# EAGLE board Modular Microcontroller 2560 (EAGLE 9.1.3)
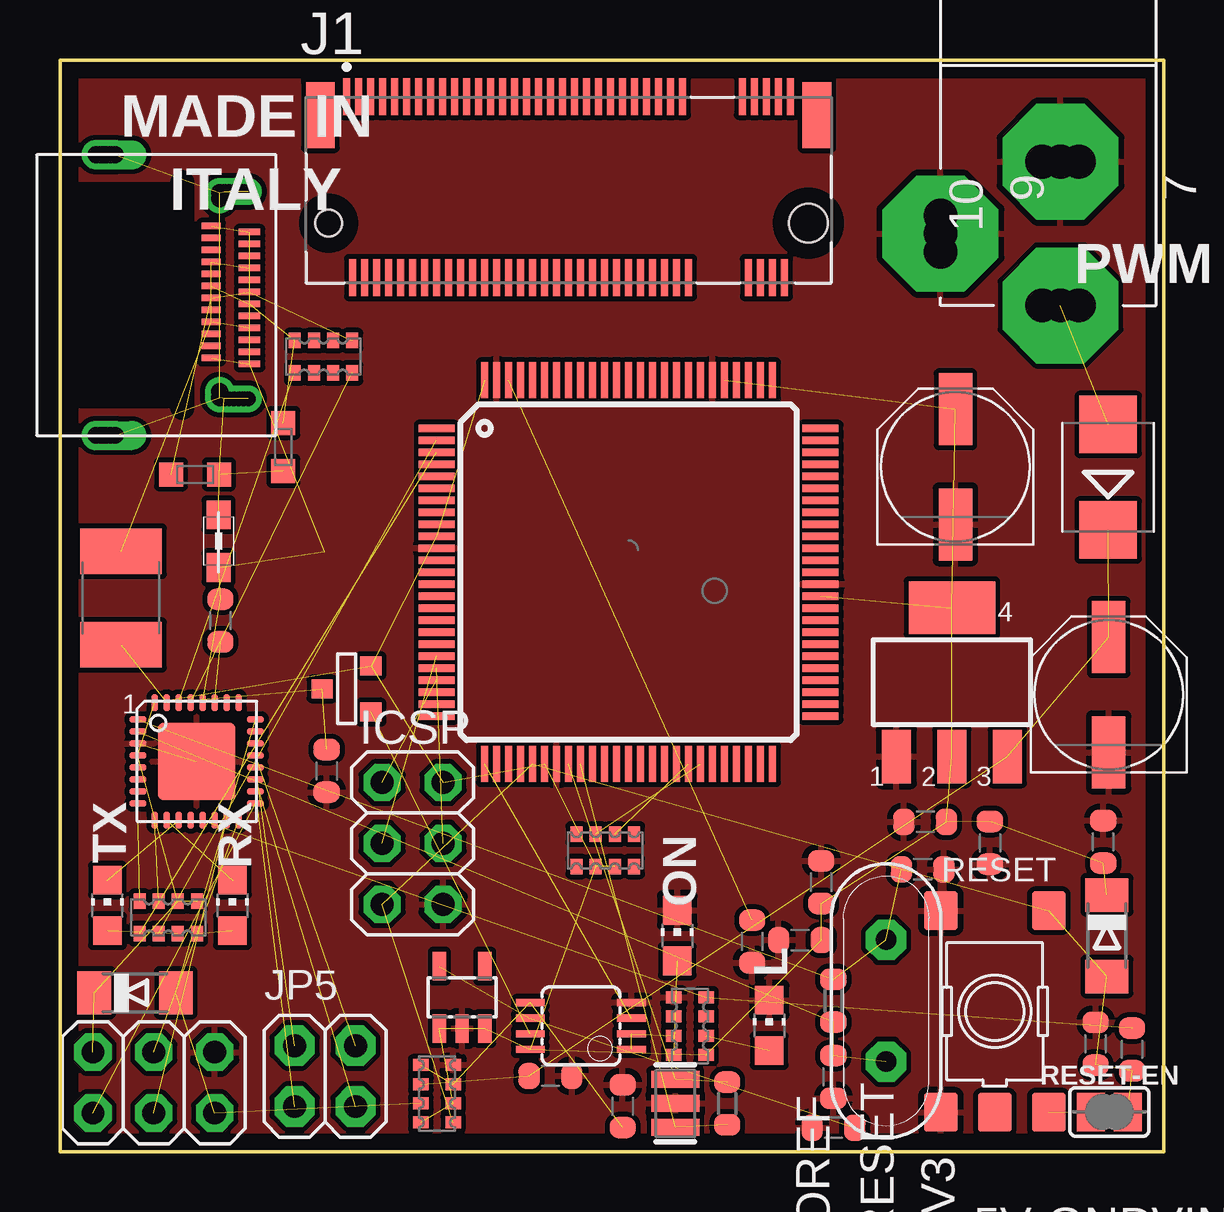
[diagram p0: board, top side]
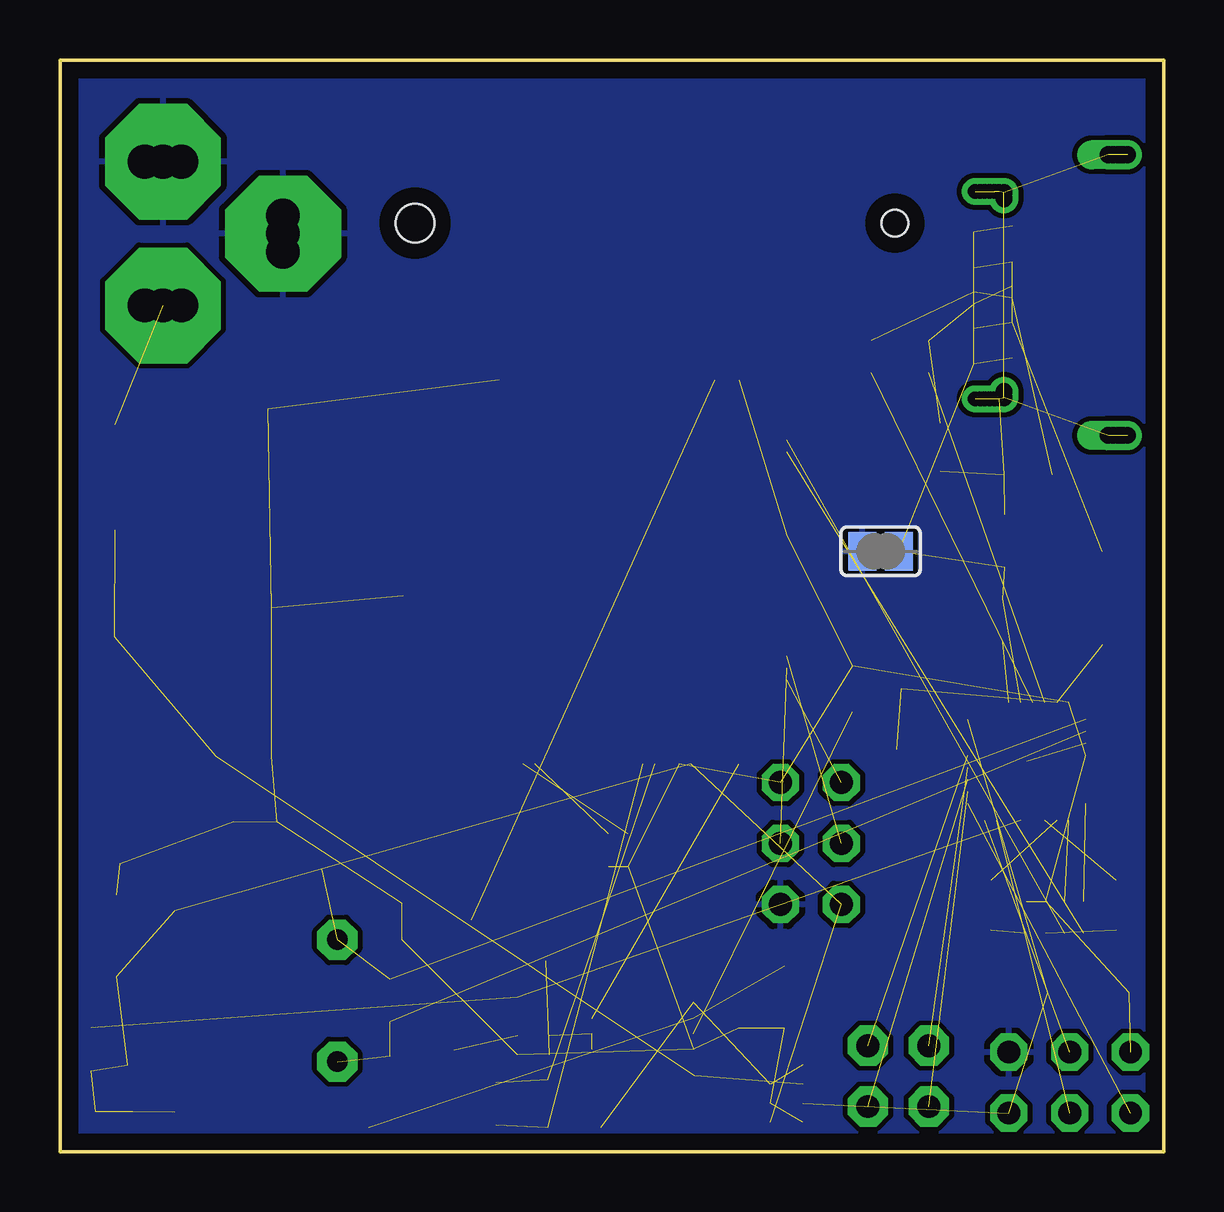
[diagram p1: board, bottom side, seen from below]

Size 46 x 45.5 mm. Coordinates in mm from the lower left corner, seen from the top.
Outline: 1.5,0 46,0 46,45.5 0,45.5 0,0
Outline: 1.5,0 0.5,0 0,0
Outline: 0,0 1.5,0
Copper layers (1*16): Top 0.035mm / dielectric 1.5mm / Bottom 0.035mm
Design rules "default *": minimum track width 25mil, minimum drill 16mil, track to track 7mil, track to pad 7mil, pad to pad 8mil, via to via 10mil, smd to smd 7mil, copper to edge 27mil, drill to drill 5mil, minimum pad ring 10mil, minimum via ring 10mil, stop-mask expansion 2mil, vias tented up to drill 24mil, thermal gap 10mil
Net classes: 0 default: width 0.203 mm, drill 0.406 mm, clearance 0.203 mm; 1 power: width 0.61 mm, drill 0.406 mm, clearance 0.203 mm; 2 gnd: width 0.305 mm, drill 0.406 mm, clearance 0.203 mm; 3 power usb: width 0.508 mm, drill 0.406 mm, clearance 0.203 mm

## Footprints (pad centres in the part's own frame; a part is rotated, then mirrored left to right if it is on the bottom)
C0603-ROUND = smd 0.898 x 1.1: 1 -0.889,0; 2 0.889,0
SMB = smd 2.4 x 2.4: A 2.2,0; C -2.2,0
MINIMELF = smd 1.4 x 1.8: A 1.7,0; C -1.7,0
L1812 = smd 1.9 x 3.4: 1 -1.95,0; 2 1.95,0
SJ = smd 1.168 x 1.6: 1 -0.762,0; 2 0.762,0
SOT223 = smd 1.219 x 2.235: 1 -2.311,-3.099; 2 0,-3.099; 3 2.311,-3.099 | smd 3.6 x 2.2: 4 0,3.099
TQFP100 = smd 1.5 x 0.3: 1 -8,6; 2 -8,5.5; 3 -8,5; 4 -8,4.5; 5 -8,4; 6 -8,3.5; 7 -8,3; 8 -8,2.5; 9 -8,2; 10 -8,1.5; 11 -8,1; 12 -8,0.5; 13 -8,0; 14 -8,-0.5; 15 -8,-1; 16 -8,-1.5; 17 -8,-2; 18 -8,-2.5; 19 -8,-3; 20 -8,-3.5; 21 -8,-4; 22 -8,-4.5; 23 -8,-5; 24 -8,-5.5; 25 -8,-6; 51 8,-6; 52 8,-5.5; 53 8,-5; 54 8,-4.5; 55 8,-4; 56 8,-3.5; 57 8,-3; 58 8,-2.5; 59 8,-2; 60 8,-1.5; 61 8,-1; 62 8,-0.5; 63 8,0; 64 8,0.5; 65 8,1; 66 8,1.5; 67 8,2; 68 8,2.5; 69 8,3; 70 8,3.5; 71 8,4; 72 8,4.5; 73 8,5; 74 8,5.5; 75 8,6 | smd 0.3 x 1.5: 26 -6,-8; 27 -5.5,-8; 28 -5,-8; 29 -4.5,-8; 30 -4,-8; 31 -3.5,-8; 32 -3,-8; 33 -2.5,-8; 34 -2,-8; 35 -1.5,-8; 36 -1,-8; 37 -0.5,-8; 38 0,-8; 39 0.5,-8; 40 1,-8; 41 1.5,-8; 42 2,-8; 43 2.5,-8; 44 3,-8; 45 3.5,-8; 46 4,-8; 47 4.5,-8; 48 5,-8; 49 5.5,-8; 50 6,-8; 76 6,8; 77 5.5,8; 78 5,8; 79 4.5,8; 80 4,8; 81 3.5,8; 82 3,8; 83 2.5,8; 84 2,8; 85 1.5,8; 86 1,8; 87 0.5,8; 88 0,8; 89 -0.5,8; 90 -1,8; 91 -1.5,8; 92 -2,8; 93 -2.5,8; 94 -3,8; 95 -3.5,8; 96 -4,8; 97 -4.5,8; 98 -5,8; 99 -5.5,8; 100 -6,8
MLF32 = smd 0.7 x 0.28: 1 -2.45,1.75; 2 -2.45,1.25; 3 -2.45,0.75; 4 -2.45,0.25; 5 -2.45,-0.25; 6 -2.45,-0.75; 7 -2.45,-1.25; 8 -2.45,-1.75; 17 2.45,-1.75; 18 2.45,-1.25; 19 2.45,-0.75; 20 2.45,-0.25; 21 2.45,0.25; 22 2.45,0.75; 23 2.45,1.25; 24 2.45,1.75 | smd 0.28 x 0.7: 9 -1.75,-2.45; 10 -1.25,-2.45; 11 -0.75,-2.45; 12 -0.25,-2.45; 13 0.25,-2.45; 14 0.75,-2.45; 15 1.25,-2.45; 16 1.75,-2.45; 25 1.75,2.45; 26 1.25,2.45; 27 0.75,2.45; 28 0.25,2.45; 29 -0.25,2.45; 30 -0.75,2.45; 31 -1.25,2.45; 32 -1.75,2.45 | smd 3.254 x 3.254: 33 0,0
SOT23-DBV = smd 0.55 x 1.2: 1 -0.95,-1.3; 2 0,-1.3; 3 0.95,-1.3; 4 0.95,1.3; 5 -0.95,1.3
MSOP08 = smd 0.3 x 1.2: 1 -0.976,-2.113; 2 -0.326,-2.113; 3 0.324,-2.113; 4 0.974,-2.113; 5 0.974,2.112; 6 0.324,2.112; 7 -0.326,2.112; 8 -0.976,2.112
2X03 = drill 0.95 pad 1.55 octagon: 1 -2.54,-1.27; 2 -2.54,1.27; 3 0,-1.27; 4 0,1.27; 5 2.54,-1.27; 6 2.54,1.27
TE_1-2199119-3 = smd 0.3 x 1.55: 1 -9.25,5.275; 2 -9,-2.275; 3 -8.75,5.275; 4 -8.5,-2.275; 5 -8.25,5.275; 6 -8,-2.275; 7 -7.75,5.275; 8 -7.5,-2.275; 9 -7.25,5.275; 10 -7,-2.275; 11 -6.75,5.275; 12 -6.5,-2.275; 13 -6.25,5.275; 14 -6,-2.275; 15 -5.75,5.275; 16 -5.5,-2.275; 17 -5.25,5.275; 18 -5,-2.275; 19 -4.75,5.275; 20 -4.5,-2.275; 21 -4.25,5.275; 22 -4,-2.275; 23 -3.75,5.275; 24 -3.5,-2.275; 25 -3.25,5.275; 26 -3,-2.275; 27 -2.75,5.275; 28 -2.5,-2.275; 29 -2.25,5.275; 30 -2,-2.275; 31 -1.75,5.275; 32 -1.5,-2.275; 33 -1.25,5.275; 34 -1,-2.275; 35 -0.75,5.275; 36 -0.5,-2.275; 37 -0.25,5.275; 38 0,-2.275; 39 0.25,5.275; 40 0.5,-2.275; 41 0.75,5.275; 42 1,-2.275; 43 1.25,5.275; 44 1.5,-2.275; 45 1.75,5.275; 46 2,-2.275; 47 2.25,5.275; 48 2.5,-2.275; 49 2.75,5.275; 50 3,-2.275; 51 3.25,5.275; 52 3.5,-2.275; 53 3.75,5.275; 54 4,-2.275; 55 4.25,5.275; 56 4.5,-2.275; 57 4.75,5.275; 58 5,-2.275; 67 7.25,5.275; 68 7.5,-2.275; 69 7.75,5.275; 70 8,-2.275; 71 8.25,5.275; 72 8.5,-2.275; 73 8.75,5.275; 74 9,-2.275; 75 9.25,5.275 | smd 1.2 x 2.75: S1 -10.35,4.5; S2 10.35,4.5 | hole 1.1: -10,0 | hole 1.6: 10,0
2X02 = drill 0.95 pad 1.676 octagon: 1 -1.27,-1.27; 2 -1.27,1.27; 3 1.27,-1.27; 4 1.27,1.27
CHIP-LED0805 = smd 1.2 x 1.2: A 0,-1.05; C 0,1.05
0805 = smd 1.2 x 1: 1 -1.1,0; 2 1.1,0
PANASONIC_D = smd 3 x 1.4: + 2.4,0; - -2.4,0
R0603-ROUND = smd 0.898 x 1.1: 1 -0.889,0; 2 0.889,0
TS42 = smd 1.6 x 1.4: 1 -4.2,2.25; 2 4.2,2.25; 3 -4.2,-2.25; 4 4.2,-2.25; 5 -4.2,0
CAT16 = smd 0.5 x 0.65: 1 -1.2,-0.675; 2 -0.4,-0.675; 3 0.4,-0.675; 4 1.2,-0.675; 5 1.2,0.675; 6 0.4,0.675; 7 -0.4,0.675; 8 -1.2,0.675
CAY16 = smd 0.5 x 0.65: 1 -1.2,-0.675; 2 -0.4,-0.675; 3 0.4,-0.675; 4 1.2,-0.675; 5 1.2,0.675; 6 0.4,0.675; 7 -0.4,0.675; 8 -1.2,0.675
SOT-23 = smd 0.787 x 0.889: 1 0.025,-1.016; 2 -0.94,1.016; 3 0.991,1.016
USB-TYPE-C-SMT = smd 0.27 x 0.9: 1 -2.625,0.7; 2 -2.125,0.7; 3 -1.625,0.7; 4 -1.125,0.7; 5 -0.625,0.7; 6 -0.125,0.7; 7 0.375,0.7; 8 0.875,0.7; 9 1.375,0.7; 10 1.875,0.7; 11 2.375,0.7; 12 2.875,0.7 | smd 0.27 x 0.8: B1 2.625,-0.9; B2 2.125,-0.9; B3 1.625,-0.9; B4 1.125,-0.9; B5 0.625,-0.9; B6 0.125,-0.9; B7 -0.375,-0.9; B8 -0.875,-0.9; B9 -1.375,-0.9; B10 -1.875,-0.9; B11 -2.375,-0.9; B12 -2.875,-0.9 | drill 0.6: P$1 -4.32,0.25; P$2 4.32,0.65; P$3 -4.32,0.65; P$4 -4.32,0.45; P$7 -4.32,-0.35; P$8 -4.32,0.05; P$9 -4.32,-0.15; P$10 4.32,0.45; P$11 4.32,0.25; P$12 4.32,0.05; P$13 4.32,-0.15; P$14 4.32,-0.35 | drill 0.7 offset: P$5 5.85,-5.4; P$23 -5.85,-5.4 | drill 0.7: P$6 -5.85,-5.3; P$15 4.27,-0.55; P$16 -4.02,-0.55; P$17 -4.27,-0.55; P$18 4.02,-0.55; P$19 -5.85,-5.7; P$20 -5.85,-5.5; P$21 -5.85,-5.1; P$22 -5.85,-4.9; P$24 5.85,-5.7; P$25 5.85,-5.5; P$26 5.85,-5.3; P$27 5.85,-5.1; P$28 5.85,-4.9
POWERSUPPLY_DC-21MM = drill 1.4 pad 4.826 octagon: 1 -5.08,-3.353; 2 -0.076,-6.35; 3 -0.076,-0.356 | drill 1.4: 4 -5.08,-4.115; 5 -5.08,-2.591; 6 -0.838,-0.356; 7 0.686,-0.356; 8 -0.838,-6.35; 9 0.686,-6.35
RESONATOR = smd 0.7 x 2: 1 -1,0; 2 0,0; 3 1,0
QS = drill 0.85 pad 1.676 octagon: 1 -2.54,0; 2 2.54,0
CT/CN0603 = smd 1 x 1: 1 -1,0; 2 1,0

## Placement (x,y rotation side)
C1  22p  [C0603-ROUND]  43.17,4.49 90 top
C2  100n  [C0603-ROUND]  20.45,3.15 0 top
C3  100n  [C0603-ROUND]  28.85,8.76 270 top
C4  100n  [C0603-ROUND]  43.49,12.91 90 top
C5  100n  [C0603-ROUND]  31.73,11.23 90 top
C6  100n  [C0603-ROUND]  30.84,8.82 180 top
C7  100n  [C0603-ROUND]  44.69,4.26 270 top
C8  100n  [C0603-ROUND]  11.11,15.86 270 top
C9  100n  [C0603-ROUND]  38.76,12.86 270 top
C10  1u  [C0603-ROUND]  6.69,22.14 90 top
C11  100n  [C0603-ROUND]  36.06,13.74 0 top
C12  100n  [C0603-ROUND]  23.45,1.89 270 top
C13  1u  [C0603-ROUND]  32.24,0.99 0 top
C14  22p  [C0603-ROUND]  35.96,11.76 0 top
C15  22p  [C0603-ROUND]  32.24,3.11 270 top
D1  M7  [SMB]  43.69,28.11 90 top
D2  CD1206-S01575  [MINIMELF]  3.13,6.62 0 top
D3  CD1206-S01575  [MINIMELF]  43.64,9 270 top
F1  MF-MSMF050-2 500mA  [L1812]  2.54,23.07 90 top
GROUND  [SJ]  11.79,25.02 180 bottom
IC1  NCP1117ST50T3G  [SOT223]  37.18,19.56 0 top
IC3  ATMEGA2560-16AU  [TQFP100]  23.7,24.15 0 top
IC4  ATMEGA16U2-MU  [MLF32]  5.7,16.26 0 top
IC6  LP2985-33DBVR  [SOT23-DBV]  16.76,6.43 0 top
IC7  LMV358IDGKR  [MSOP08]  21.71,5.24 90 top
ICSP  3x2M  [2X03]  14.7,12.84 270 top
ICSP1  3x2M  [2X03]  3.91,2.87 0 top
J1  1-2199119-3  [TE_1-2199119-3]  21.2,38.7 0 top
JP5  2x2M - NM  [2X02]  11.05,3.14 0 top
L  YELLOW  [CHIP-LED0805]  29.56,5.26 0 top
L1  BLM21  [0805]  6.61,25.45 90 top
ON  GREEN  [CHIP-LED0805]  25.73,9 0 top
PC1  47u  [PANASONIC_D]  43.72,19.04 90 top
PC2  47u  [PANASONIC_D]  37.33,28.54 90 top
R1  1M  [R0603-ROUND]  27.81,2.01 90 top
R2  1M  [R0603-ROUND]  32.24,6.29 270 top
RESET  TS42031-160R-TR-7260  [TS42]  38.97,5.84 90 top
RESET-EN  [SJ]  43.74,1.65 0 top
RN1  10K  [CAT16]  22.73,12.55 180 top
RN2  22R  [CAY16]  10.98,33.13 0 top
RN3  1k  [CAY16]  26.26,5.23 90 top
RN4  1k  [CAY16]  4.52,9.76 0 top
RN5  10K  [CAT16]  15.71,2.41 90 top
RX  YELLOW  [CHIP-LED0805]  7.19,10.26 0 top
T1  FDN340P  [SOT-23]  11.94,19.31 270 top
TX  YELLOW  [CHIP-LED0805]  1.98,10.26 0 top
U$2  USB-TYPE-C  [USB-TYPE-C-SMT]  7.2,35.7 270 top
X1  POWERSUPPLY_DC21MMX  [POWERSUPPLY_DC-21MM]  41.78,41.62 0 top
Y1  CSTCE16M0V53-R0 16MHZ  [RESONATOR]  25.65,2.01 270 top
Y2  16MHz  [QS]  34.44,6.29 90 top
Z1  CG0603MLC-05E  [CT/CN0603]  9.31,29.37 90 top
Z2  CG0603MLC-05E  [CT/CN0603]  5.63,28.22 180 top

## Library data of the parts
C1-C15 IC3 IC4 IC6 ICSP ICSP1 JP5 R1 R2 RESET X1 Y1 Y2 = SmartPrj
D1-D3 = diode
F1 PC1 PC2 = rcl
GROUND RESET-EN = jumper
IC1 IC7 = linear
J1 = 1-2199119-3; AVAILABILITY: Unavailable; DESCRIPTION: M.2 0.5PITCH 3.2H Key M Goldflash; MF: TE Connectivity / AMP; MP: 1-2199119-3; PACKAGE: None; PRICE: None
L ON RX TX = led
L1 = wuerth-elektronik
RN1-RN5 = resistor-dil
T1 = zetex
U$2 = lio
Z1 Z2 = varistor

## Nets
5-GND: RESET.5
8PB4: IC4.18 JP5.1
8PB5: IC4.19 JP5.3
8PB6: IC4.20 JP5.2
8PB7: IC4.21 JP5.4
+3V3 [power]: C13.2 IC6.5 IC7.6
+5V [power usb]: C4.1 C5.1 C6.1 C9.1 C11.2 D2.C D3.C IC1.2 IC1.4 IC3.10 IC3.31 IC3.61 IC3.80 IC3.100 IC4.4 IC4.32 IC6.1 IC6.3 IC7.8 ICSP1.2 ICSP.2 PC2.+ RN1.6 RN1.7 RN3.1 RN4.5 RN4.6 RN5.2 RN5.8 T1.2
ADC0: IC3.97
ADC1: IC3.96
ADC2: IC3.95
ADC3: IC3.94
ADC4: IC3.93
ADC5: IC3.92
ADC6: IC3.91
ADC7: IC3.90
ADC8: IC3.89
ADC9: IC3.88
ADC10: IC3.87
ADC11: IC3.86
ADC12: IC3.85
ADC13: IC3.84
ADC14: IC3.83
ADC15: IC3.82
AREF: C3.1 IC3.98
CMP: C12.2 IC7.5 RN5.3 RN5.5
D+: RN2.5 U$2.6 U$2.B6 Z2.2
D-: RN2.8 U$2.7 U$2.B7 Z1.2
DTR: C7.1 IC4.13 RN3.4
GATE_CMD: IC7.7 T1.3
GND [gnd]: C1.2 C2.2 C3.2 C4.2 C5.2 C6.2 C8.2 C9.2 C11.1 C12.1 C13.1 C14.2 C15.2 GROUND.2 IC1.1 IC3.11 IC3.32 IC3.62 IC3.81 IC3.99 IC4.3 IC4.33 IC6.2 IC7.4 ICSP1.6 ICSP.6 L.C ON.C PC1.- PC2.- RESET.1 RESET.2 RN3.5 RN5.4 X1.1 X1.3 Y1.2
L13: IC7.1 IC7.2 RN3.7
M8RXD: IC4.9 RN4.7
M8TXD: IC4.8 RN4.8
MISO2: IC4.17 ICSP1.1
MOSI2: IC4.16 ICSP1.4
N$2: L.A RN3.2
N$3: ON.A RN3.8
N$54: RN4.4 RX.A
N$55: RN4.3 TX.A
PA0: IC3.78
PA1: IC3.77
PA2: IC3.76
PA3: IC3.75
PA4: IC3.74
PA5: IC3.73
PA6: IC3.72
PA7: IC3.71
PB0: IC3.19
PB1: IC3.20 ICSP.3
PB2: IC3.21 ICSP.4
PB3: IC3.22 ICSP.1
PB4: IC3.23
PB5: IC3.24
PB6: IC3.25
PB7: IC3.26 IC7.3
PC0: IC3.53
PC1: IC3.54
PC2: IC3.55
PC3: IC3.56
PC4: IC3.57
PC5: IC3.58
PC6: IC3.59
PC7: IC3.60
PD7: IC3.50
PE0: IC3.2 RN4.2
PE1: IC3.3 RN4.1
PE3: IC3.5
PE4: IC3.6
PE5: IC3.7
PG0: IC3.51
PG1: IC3.52
PG2: IC3.70
PG5: IC3.1
PH3: IC3.15
PH4: IC3.16
PH5: IC3.17
PH6: IC3.18
PL0: IC3.35
PL1: IC3.36
PL2: IC3.37
PL3: IC3.38
PL4: IC3.39
PL5: IC3.40
PL6: IC3.41
PL7: IC3.42
PWRIN [power]: D1.A X1.2
RD+: IC4.29 RN2.4
RD-: IC4.30 RN2.1
RESET: C1.1 C7.2 D3.A IC3.30 ICSP.5 RESET-EN.1 RESET-EN.2 RESET.3 RESET.4 RN5.1
RESET2: D2.A IC4.24 ICSP1.5 RN5.7
RXD1: IC3.45
RXD2: IC3.12
RXD3: IC3.63
RXL: IC4.10 RX.C
SCK2: IC4.15 ICSP1.3
SCL: IC3.43 RN1.2
SDA: IC3.44 RN1.3
TXD1: IC3.46
TXD2: IC3.13
TXD3: IC3.64
TXL: IC4.11 TX.C
UGND [gnd]: C10.2 GROUND.1 IC4.28 L1.1 U$2.1 U$2.12 U$2.B1 U$2.B12
USBVCC [power usb]: C8.1 F1.1 IC4.31 T1.1
USHIELD [gnd]: L1.2 U$2.P$1 U$2.P$2 U$2.P$3 U$2.P$4 U$2.P$5 U$2.P$6 U$2.P$7 U$2.P$8 U$2.P$9 U$2.P$10 U$2.P$11 U$2.P$12 U$2.P$13 U$2.P$14 U$2.P$15 U$2.P$16 U$2.P$17 U$2.P$18 U$2.P$19 U$2.P$20 U$2.P$21 U$2.P$22 U$2.P$23 U$2.P$24 U$2.P$25 U$2.P$26 U$2.P$27 U$2.P$28 Z1.1 Z2.1
VBUS [power usb]: F1.2 U$2.4 U$2.9 U$2.B4 U$2.B9
VIN [power]: C2.1 D1.C IC1.3 PC1.+ RN5.6
VUCAP: C10.1 IC4.27
XT1: C14.1 IC4.1 R2.1 Y2.2
XT2: C15.1 IC4.2 R2.2 Y2.1
XTAL1: IC3.34 R1.1 Y1.3
XTAL2: IC3.33 R1.2 Y1.1

## Tracks (layer width: path | path; a pad name or v marks a point on that pad's centre or on a via)
8PB4  (1 unrouted)
8PB5  (1 unrouted)
8PB6  (1 unrouted)
8PB7  (1 unrouted)
+3V3  (2 unrouted)
+5V  (29 unrouted)
AREF  (1 unrouted)
CMP  (3 unrouted)
D+  (3 unrouted)
D-  (3 unrouted)
DTR  (2 unrouted)
GATE_CMD  (1 unrouted)
GND  (1 unrouted)
  pour Bottom: 0,45.5 46,45.5 46,0 0,0
  pour Top: 0,45.5 46,45.5 46,0.5 46,0 0,0
L13  (2 unrouted)
M8RXD  (1 unrouted)
M8TXD  (1 unrouted)
MISO2  (1 unrouted)
MOSI2  (1 unrouted)
N$2  (1 unrouted)
N$3  (1 unrouted)
N$54  (1 unrouted)
N$55  (1 unrouted)
PB1  (1 unrouted)
PB2  (1 unrouted)
PB3  (1 unrouted)
PB7  (1 unrouted)
PE0  (1 unrouted)
PE1  (1 unrouted)
PWRIN  (1 unrouted)
RD+  (1 unrouted)
RD-  (1 unrouted)
RESET  (9 unrouted)
RESET2  (3 unrouted)
RXL  (1 unrouted)
SCK2  (1 unrouted)
SCL  (1 unrouted)
SDA  (1 unrouted)
TXL  (1 unrouted)
UGND  (7 unrouted)
USBVCC  (3 unrouted)
USHIELD  (30 unrouted)
VBUS  (4 unrouted)
VIN  (4 unrouted)
VUCAP  (1 unrouted)
XT1  (3 unrouted)
XT2  (3 unrouted)
XTAL1  (2 unrouted)
XTAL2  (2 unrouted)

## Text on the board
tPlace: 9 | 7 | 10
tNames: MADE IN | ITALY | PWM | IOREF | RESET | 3V3 | 5V | GND | VIN